# Altium PCB Task_Board.PcbDoc
Units mil, origin at the board's own origin, x right, y up, seen from the top; angles counter-clockwise.
Board outline 4500 x 4500 mil, 2 copper layers (Top Layer, Bottom Layer); 14 components, 12 nets, 71 pads, 2 vias.
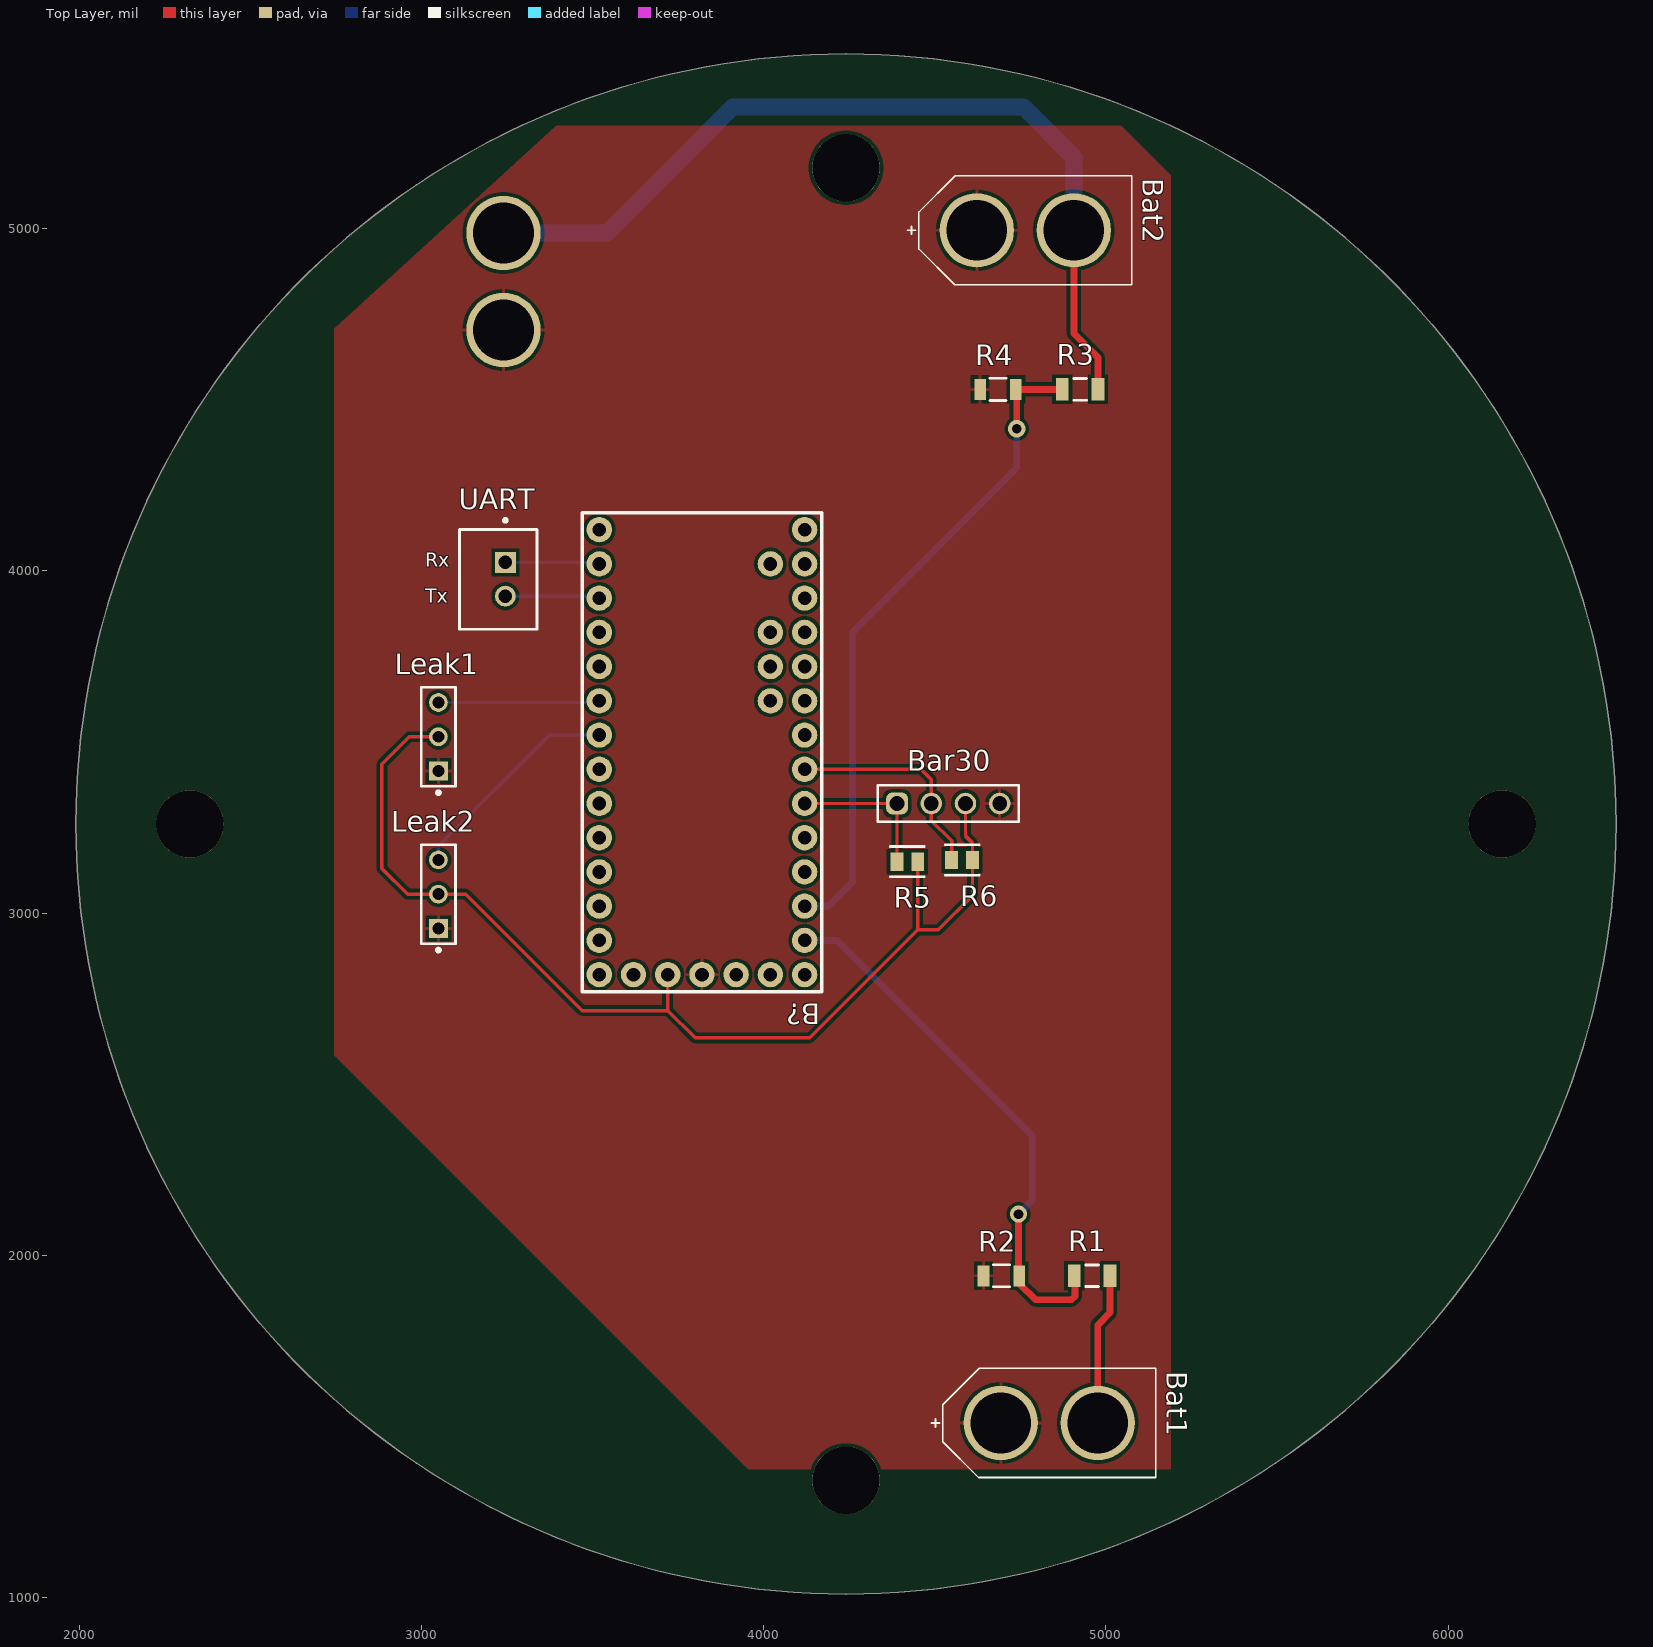
[diagram p0: Top Layer view]
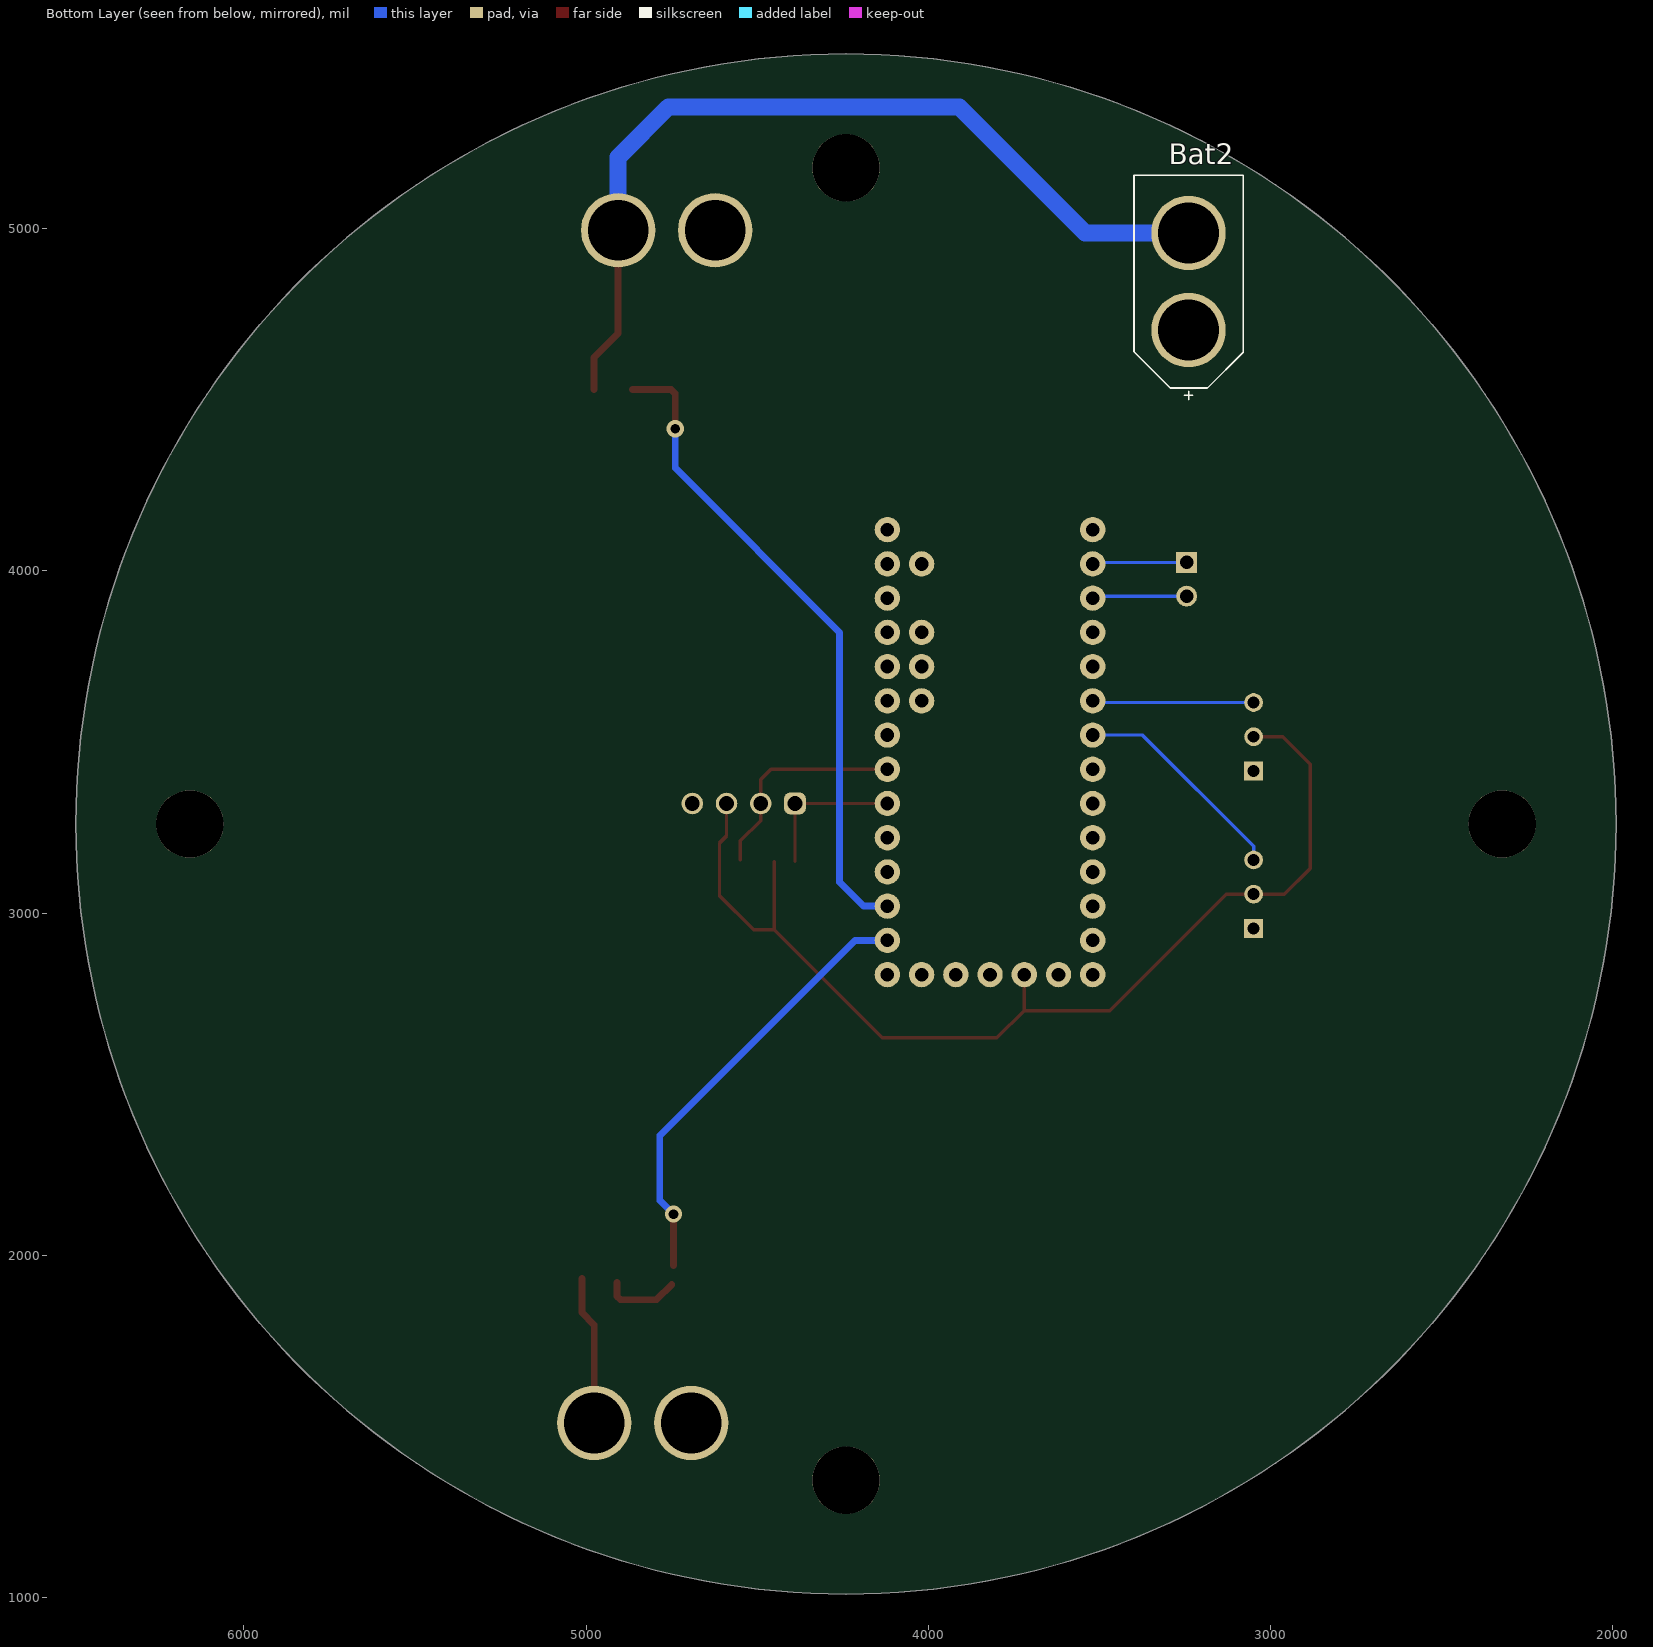
[diagram p1: Bottom Layer view, seen from below]
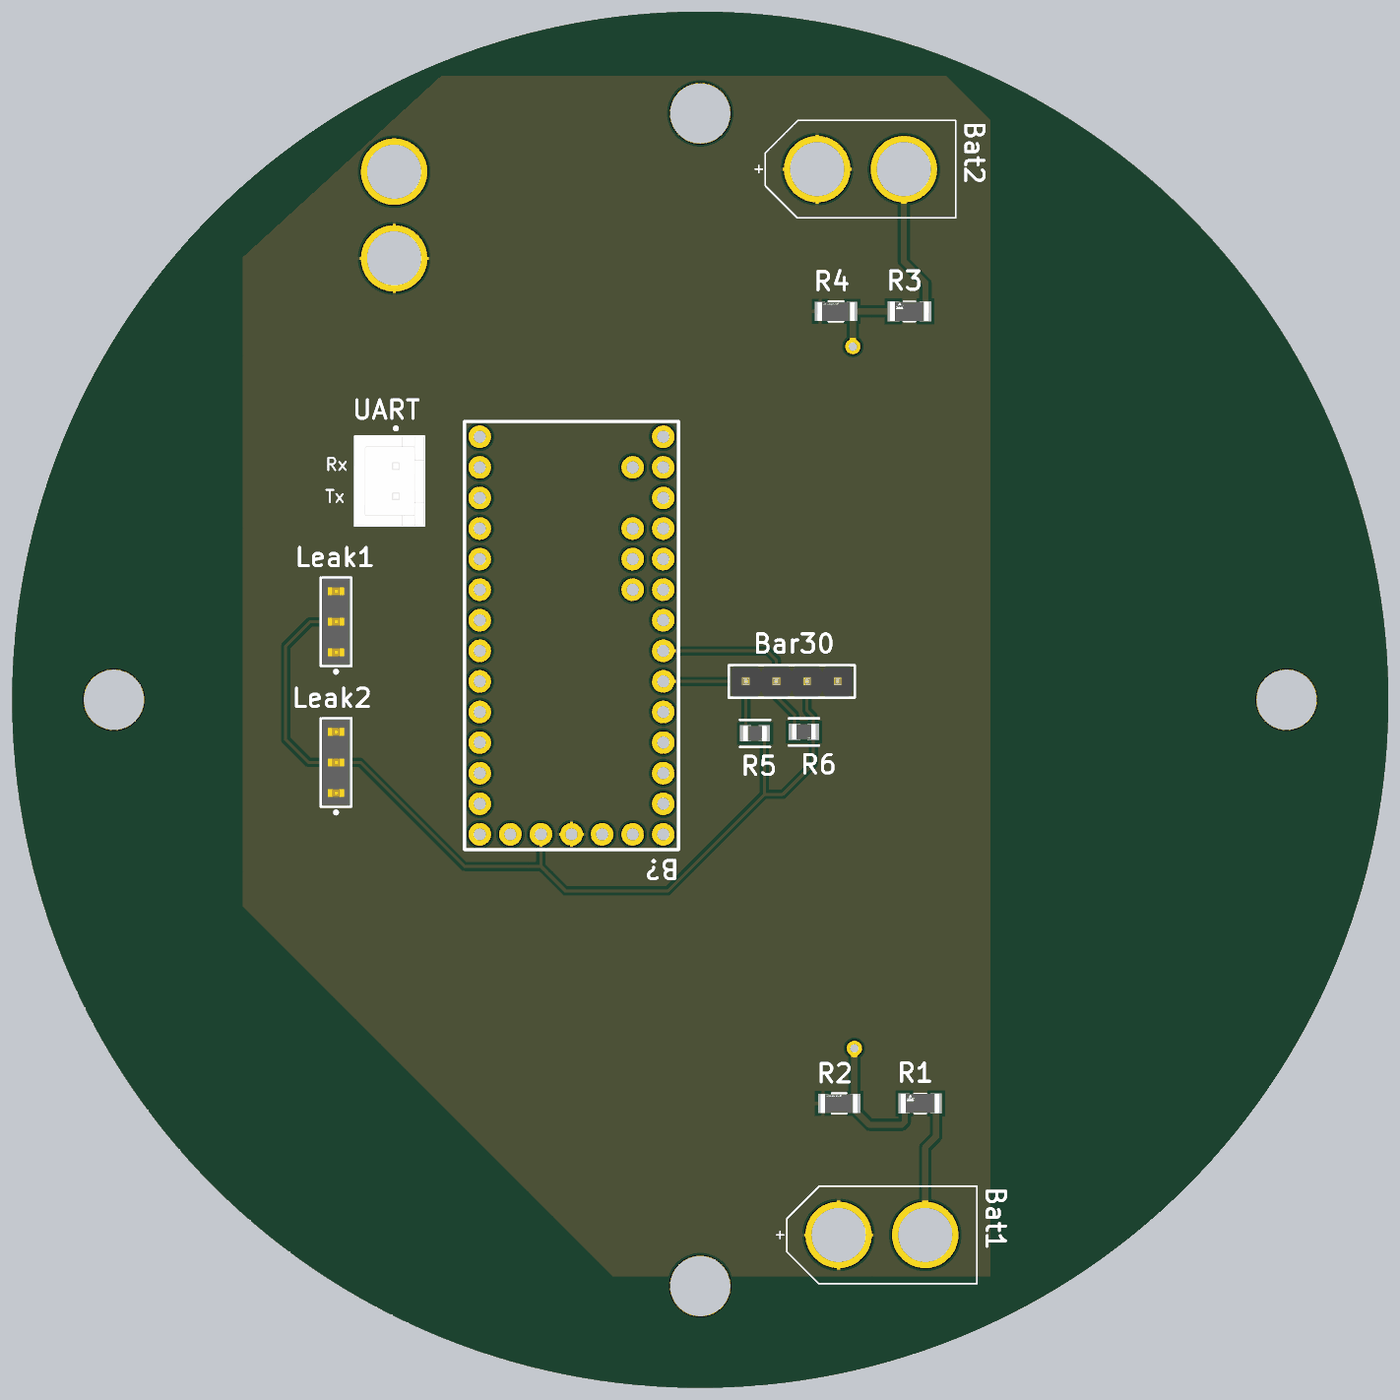
[diagram p2: 3D render of the assembled board from above, using the file's embedded part models]

## Layer stack, top to bottom
Top Solder: solder mask 0.4, Solder Resist, Dk 3.5
Top Layer: signal copper 1.4
Dielectric 1: dielectric 12.6, FR-4, Dk 4.8
Bottom Layer: signal copper 1.4
Bottom Solder: solder mask 0.4, Solder Resist, Dk 3.5

## Board outline
4240.93,1010.05 cw(c4240.93,3260.05) 1990.93,3260.05 cw(c4240.93,3260.05) 4240.93,5510.05 cw(c4240.93,3260.05) 6490.93,3260.05 cw(c4240.93,3260.05)

## Design rules (kind name [scope] priority, off if disabled: settings)
Clearance [All] p1: gap=10 ignorepadtopadclearanceinfootprint=FALSE except(0: Arc-Hole Track-Hole SMDPad-Hole THPad-Hole Via-Hole Fill-Hole Poly-Hole Region-Hole Text-Hole; 4: Arc-Arc Arc-Track Track-Track)
HoleSize [All] p1: absolutevalues=TRUE maxlimit=200 minlimit=1 maxpercent=80.000 minpercent=20.000
PolygonConnect [All] p1: connectstyle=Relief reliefconductorwidth=10 reliefentries=4 polygonreliefangle="90 Angle" airgapwidth=10
RoutingVias [All] p1: holewidth=28 width=50 viastyle="Through Hole" minholewidth=28 minwidth=50 maxholewidth=28 maxwidth=50
SilkToSolderMaskClearance [IsPad vs OnLayer('Top Overlay')] p1: minsilkscreentomaskgap=2 clearancetoexposedcopper=FALSE
SolderMaskExpansion [All] p1: expansion=4 istentingtop=FALSE
Width [All] p1: maxlimit=50 minlimit=10 preferedwidth=10
28 further rules are at their usual default settings.

## Classes and differential pairs
component class Teensy_taskboard: B? Bar30 Bat1 Bat2 Leak1 Leak2 R1 R2 R3 R4 R5 R6 UART

## Components (designator, comment, footprint, x,y, rotation, side; value= is the part's Value field where it differs from the comment)
B? "Teensy 3.2" "Teensy 3.2-Footprint-1" 3820,3470 r180 top
Bar30 "61300411121" 61300411121 4540,3320 r0 top
Bat1 "XT-60" PRT-10474-Footprint-1 4835,1510 r270 top
Bat2 "XT-60" PRT-10474-Footprint-1 3240,4845 r180 bottom
Bat2 "XT-60" PRT-10474-Footprint-1 4765,4995 r270 top
Leak1 "87224-3" FP-87224-3-MFG 3050,3515 r90 top
Leak2 "87224-3" FP-87224-3-MFG 3050,3055 r90 top
R1 "CRCW12061K50FKEA" FP-CRCW1206-e3-IPC_C 4960,1940 r180 top
R2 "CR1206-FX-4120ELF" FP-CR1206-IPC_C 4695,1940 r180 top
R3 "CRCW12061K50FKEA" FP-CRCW1206-e3-IPC_C 4925,4530 r180 top
R4 "CR1206-FX-4120ELF" FP-CR1206-IPC_C 4685,4530 r180 top
R5 "RR1220P-561-D" FP-RR1220-IPC_C 4420,3150 r0 top
R6 "RR1220P-561-D" FP-RR1220-IPC_C 4580,3155 r0 top
UART "B2B-XH-A(LF)(SN)" FP-B2B-XH-A_LF_SN-MFG 3225,3975 r270 top

## Footprints (in the part's own frame and the unit in brackets; to place one, negate y for a bottom-side part, rotate by r counter-clockwise, add the part's x,y. Pads: shape width x height; smd on the part's side, far side on the other; paste and mask are expansions set on the pad)
61300411121 [mm] "Pin Header, pitch 2.54 mm, THT, Vertical, single row, 4p"
  rrect50% 1.6x1.6 hole 1.1: 1(-3.81,0)
  round 1.6 hole 1.1: 2(-1.27,0) 3(1.27,0) 4(3.81,0)
  silkscreen extent -5.23,-1.35 5.23,1.35, body extent -5.08,-1.27 5.08,1.27, height 8.57
FP-87224-3-MFG [mil]
  rect 54.69x54.69 hole 35 paste-99999 mask+0: 1(-100,0)
  round 54.69 hole 35 paste-99999 mask+0: 2(0,0) 3(100,0)
  silkscreen extent -168,-50 145,50, body extent -148,-54 148,54, height 10
FP-B2B-XH-A_LF_SN-MFG [mm]
  rect 1.55x1.55 hole 1 paste-2539.97 mask+0: 1(-1.25,0.525)
  round 1.55 hole 1 paste-2539.97 mask+0: 2(1.25,0.525)
  silkscreen extent -4.5,-2.88 3.7,2.88, body extent -3.8,-2.98 3.8,2.98, height 0.25
FP-CR1206-IPC_C [mil]
  rect 33.79x61.5 smd paste+0 mask+0: 1(-52.24,0) 2(52.24,0)
  silkscreen extent -24,-32 24,32, body extent -73,-36 73,36, height 10
FP-CRCW1206-e3-IPC_C [mil]
  rect 37.64x65.28 smd paste+0 mask+0: 1(-52.21,0) 2(52.21,0)
  silkscreen extent -19,-31 19,31, body extent -75,-38 75,38, height 10
FP-RR1220-IPC_C [mil]
  rect 37.59x53.39 smd paste+0 mask+0: 1(-30.54,0) 2(30.54,0)
  silkscreen extent -49,-44 49,44, body extent -53,-32 53,32, height 10
PRT-10474-Footprint-1 [mm]
  round 5.516 hole 4.5: 1(0,-3.6) 2(0,3.6)
  silkscreen extent -4.05,-8.75 4.05,7.9, body extent -4.05,-7.9 4.05,7.9, height 15.88
"Teensy 3.2-Footprint-1" [mil]
  round 74 hole 40: 0(300,-550) 1(300,-450) 2(300,-350) 3(300,-250) 3.3V(100,650) 3V(-300,-450) 4(300,-150) 5(300,-50) 6(300,50) 7(300,150) 8(300,250) 9(300,350) 10(300,450) 11(300,550) 12(300,650) 13(-300,650) 14(-300,550) 15(-300,450) 16(-300,350) 17(-300,250) 18(-300,150) 19(-300,50) 20(-300,-50) 21(-300,-150) 22(-300,-250) 23(-300,-350) A10(-200,-250) A11(-200,-150) A14/DAC(-200,650) AGND(-300,-550) AREF(-200,-350) GND(0,650) GND1(300,-650) PROG(-100,650) VBAT(200,650) VIN(-300,-650) VUSB(-200,-550)
  silkscreen extent -350,-700 350,700, body extent -350,-700 350,700, height 160

## Part data
B?: library part CMP-00000-2, "Teensy 3.2 K20 Eval Board", Core Architecture=ARM, Evaluation Kit=Yes, Series=Kinetis
Bar30: library part CMP-1502-01064-2, Color=Black, Contact Resistance=20mΩ, Current Rating=3A, Max Operating Temperature=105°C, Min Operating Temperature=-40°C, Operating Supply Voltage=250V, Connector Type="Male Pin", Contact Material=Copper, Contact Mating Length=5.9944mm, Contact Plating=Gold, Gender=Male, Height=8.89mm, Lead Free="Lead Free", Lead Pitch=2.54mm, Mount="Through Hole", NexarPartId=32855522, Number Of Contacts=4, Number of Pins=4, Number of Positions=4, Number Of Rows=1, Orientation=Vertical, Packaging=Bulk, Pitch=2.54mm, REACH SVHC=Unknown, RoHS=Compliant, Termination=Solder, Voltage Rating=250V
Bat1 Bat2 Bat2: library part CMP-002-00071-2, "XT60 female Connectors", Pins=2
Leak1 Leak2: library part CMP-2000-05697-2, "CONN HEADER VERT 3POS 2.54MM", Color=Black, Contact Current Rating=3A, Flammability Rating="UL94 V-0", High Temperature Housing=No, Max Operating Temperature=105°C, Min Operating Temperature=-65°C, Package Quantity=520, Approvals=CSA, Board Standoff="No (Without)", Connector Type=Plug, Contact Gender=Male, Contact Material=Bronze, Contact Mating Length=8.08mm, Contact Plating=Gold, Contact Post Length=0.125inch, Contact Protection="No (Without)", Contact Shape=Square, Contact Type="Male Pin", Current Rating=3A, Depth=2.54mm, ELV=Compliant, Gasket="No (Without)", High Speed Serial Data Connector=No, Housing Color=Black, Housing Material=Thermoplastic, Keyed=No, Lead Free="Lead Free", Length=7.21mm, Mating Alignment="No (Without)", Mating Connector Lock="No (Without)", Mount="Through Hole", Number Of Contacts=3, Number of Positions=3, Number Of Rows=1, Orientation=Straight, Packaging=Carton, PCB Mount Retention=Without, PCB Mounting Orientation=Vertical, PCB Thickness=1.397mm, Pitch=2.54mm, Radiation Hardening=No, RoHS Compliant=Yes, Row Spacing=2.54mm, Selectively Loaded="No (Without)", Series="AMPMODU MOD II", Stabilizers="No (Without)", Strain Relief="No (Without)", Termination="Through Hole"
R1 R3: library part CMP-02407-002229-1, "RES Thick Film, 1.5kΩ, 1%, 0.25W, 100ppm/°C, 1206", Case Code (Imperial)=1206, Case Code (Metric)=3216, Max Operating Temperature=155°C, Max Power Dissipation=250mW, Min Operating Temperature=-55°C, Package Quantity=10, Resistance=1.5kR, Temperature Coefficient=100ppm/°C, Tolerance=1%, Voltage Rating=200V, Case/Package=1206, Composition="Thick Film", Contact Plating=Tin, Depth=1.6mm, Features="Automotive AEC-Q200", Height=0.024inch, Lead Free="Lead Free", Length=3.2mm, Military Standard=Not, Number of Terminations=2, Packaging="Tape and Reel", Power Rating=250mW, Radiation Hardening=No, Termination=SMD/SMT, Voltage Rating (DC)=200V, Weight=0.000353oz, Width=0.063inch
R2 R4: library part CMP-07231-004698-1, "Thick Film Chip Resistors 1206 412Ω 0.25W 1% 100ppm/°C", Case Code (Imperial)=1206, Case Code (Metric)=3216, Max Operating Temperature=155°C, Max Power Dissipation=250mW, Min Operating Temperature=-55°C, Package Quantity=5000, Resistance=412R, Temperature Coefficient=100ppm/°C, Tolerance=1%, Voltage Rating=200V, Case/Package=1206, Composition="Thick Film", Contact Plating=Tin, Depth=1.6mm, Features="Moisture Resistant", Height=0.03inch, Length=3.2mm, Military Standard=Not, Mount="Surface Mount", Number of Terminations=2, Packaging="Tape and Reel", Power Rating=250mW, Radiation Hardening=No, Termination=SMD/SMT, Thickness=610um, Width=0.063inch
R5 R6: library part CMP-2001-03458-2, "560Ω ±0.5% 0.1W 1/10W Chip Resistor 0805 (2012 Metric) Thin Film", Case Code (Imperial)=0805, Case Code (Metric)=2012, Max Operating Temperature=125°C, Max Power Dissipation=100mW, Min Operating Temperature=-55°C, Package Quantity=1, Resistance=560R, Resistor Type="Thin Film", Temperature Coefficient=25ppm/°C, Tolerance=0.5%, Voltage Rating=100V, Case/Package=0805, Depth=1.25mm, Height=0.4mm, Lead Free="Lead Free", Length=2mm, Mount="Surface Mount", Number of Pins=2, Number of Terminations=2, Packaging="Tape and Reel", Power Rating=100mW, RoHS Compliant=Yes, Series=RR, Size Code=0805, Technology="THIN FILM", Termination=SMD/SMT, Voltage Rating (DC)=100V, Width=0.049inch
UART: library part CMP-2000-05888-3, "CONN HEADER VERT 2POS 2.5MM", Color=Natural, Contact Resistance=20mR, Current Rating=3A, Housing Color=White, Insulation Resistance=1GR, Max Operating Temperature=85°C, Max Voltage Rating (AC)=250V, Min Operating Temperature=-25°C, Connector Type="Male Pin", Contact Material=Brass, Contact Plating=Tin, Contact Type="Male Pin", Depth=5.75mm, Fastening Type=Detent, Housing Material=Polyamide, Lead Free="Lead Free", Lead Pitch=2.5mm, Length=7.4mm, Max Current Rating=3A, Max Voltage Rating (DC)=250V, Mount="Through Hole", Number Of Contacts=2, Number of Positions=2, Number Of Rows=1, Orientation=Straight, Packaging=Bulk, Pitch=2.5mm, REACH SVHC="No SVHC", Series=XH, Termination=Solder, Voltage Rating=250V, Voltage Rating (AC)=250V, Wire/Cable Gauge=22AWG

## Free pads (board coordinates)
  round 196.85 hole 196.85: 1(2323.61,3260.05) 1(4240.93,1342.72) 1(4240.93,5177.37) 1(6158.25,3260.05)

## Via types
v1: diameter 50, hole 28, Top Layer to Bottom Layer, 2 vias

## Nets (pads, with @x,y where several pads share a name; then routed paths per layer and width w, separated by ;. In a path a pad name is that pad's centre, name@x,y a point inside that pad or via, vN(x,y) a via of type N, cw(c..) or ccw(c..) an arc to the next point about the centre after c; other vN are vias at no path point)
GND: B?.GND Bar30.4 Bat1.1 Bat2.1 Leak1.1 Leak2.1 R2.2 R4.2
NetB?_0: B?.0 UART.1 | length 270.1
  Bottom Layer w10: UART.1 B?.0@3515.79,4024.21
NetB?_1: B?.1 UART.2 | length 268.5
  Bottom Layer w10: UART.2 B?.1@3514.21,3925.79
NetB?_3.3V: B?.3.3V Bar30.3 Leak1.2 Leak2.2 R5.2 R6.2 | length 3188.3
  Top Layer w10: Leak1.2 2965,3515 2885,3435 2885,3130 2960,3055 Leak2.2 3130,3055 3470,2715 3720,2715 ; B?.3.3V 3720,2715 ; R5.2 4450.54,2950.54 ; Bar30.3 4590,3225 4610.54,3204.46 R6.2 4610.54,3050.54 4510.54,2950.54 4450.54,2950.54 ; 3720,2715 3800,2635 4135,2635 4450.54,2950.54
NetB?_4: B?.4 Leak1.3 | length 465
  Bottom Layer w10: Leak1.3 B?.4@3515,3615
NetB?_5: B?.5 Leak2.3 | length 644.6
  Bottom Layer w10: Leak2.3 3050,3195 3375,3520 B?.5
NetB?_14: B?.14 R1.2 R2.1 | length 1520.5
  Top Layer w20: R2.1@4745,1970 v1(4745,2120) ; R2.1@4750,1915 4795,1870 4900,1870 4910,1880 R1.2@4910,1920
  Bottom Layer w20: B?.14 4215,2920 4785,2350 4785,2160 v1(4745,2120)
NetB?_15: B?.15 R3.2 R4.1 | length 1924.2
  Top Layer w20: v1(4740,4415) 4740,4518.28 4751.72,4530 R3.2@4865,4530
  Bottom Layer w20: B?.15 4190,3020 4260,3090 4260,3820 4739.81,4299.81 v1@4739.81,4413.34
NetB?_18: B?.18 Bar30.1 R5.1 | length 439.5
  Top Layer w10: B?.18 Bar30.1 R5.1@4390,3150.54
NetB?_19: B?.19 Bar30.2 R6.1 | length 642.1
  Top Layer w10: B?.19 4460,3420 4490,3390 Bar30.2 4490,3270 4549.46,3210.54 R6.1
NetBat1_2: Bat1.2 R1.1 | length 436.9
  Top Layer w20: Bat1.2 4976.73,1796.73 5012.21,1832.21 R1.1@5012.21,1932.21
NetBat2_2: Bat2.2 R3.1 | length 2587.5
  Top Layer w20: Bat2.2@4906.73,4995 4906.73,4693.27 4977.21,4622.79 R3.1
  Bottom Layer w50: Bat2.2@3240,4986.73 3541.73,4986.73 3910,5355 4760,5355 4906.73,5208.27 Bat2.2@4906.73,4995
pads on no net: B?.2 B?.3 B?.3V B?.6 B?.7 B?.8 B?.9 B?.10 B?.11 B?.12 B?.13 B?.16 B?.17 B?.20 B?.21 B?.22 B?.23 B?.A10 B?.A11 B?.A14/DAC B?.AGND B?.AREF B?.GND1 B?.PROG B?.VBAT B?.VIN B?.VUSB

## Polygon pours and split planes (outlines as drawn)
GND on Top Layer "GND_L01_P000" (solid, pour order 0): 2745,4707.1 2745,2585 3955,1375 5190,1375 5190,5155 5045,5300 3393.71,5300

## Silkscreen, mask and mechanical layers (free items; w line width, h text height)
Top Overlay:
  text "Rx" at 3011,4011 h40
  text "Tx" at 3011,3906 h40